# EAGLE board RSeries VCSensor v1.1 (EAGLE 6.4)
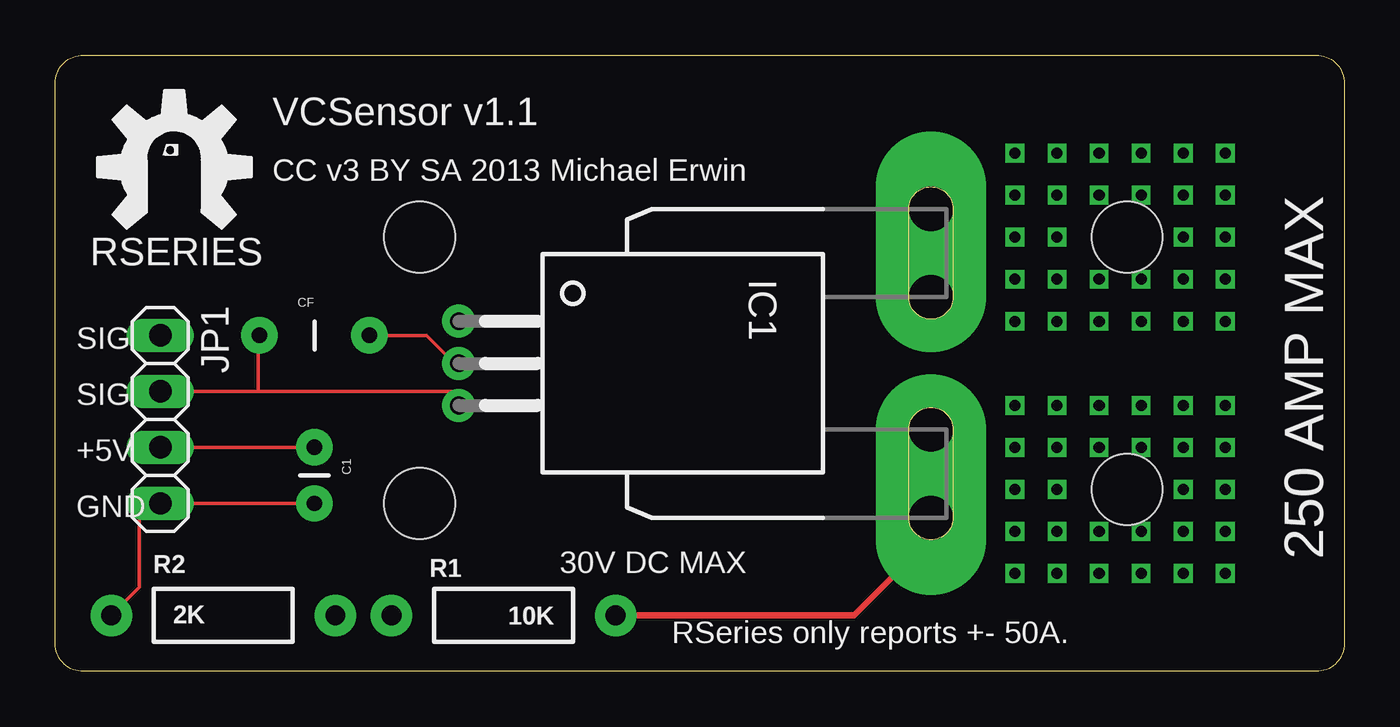
[diagram p0: board, top side]
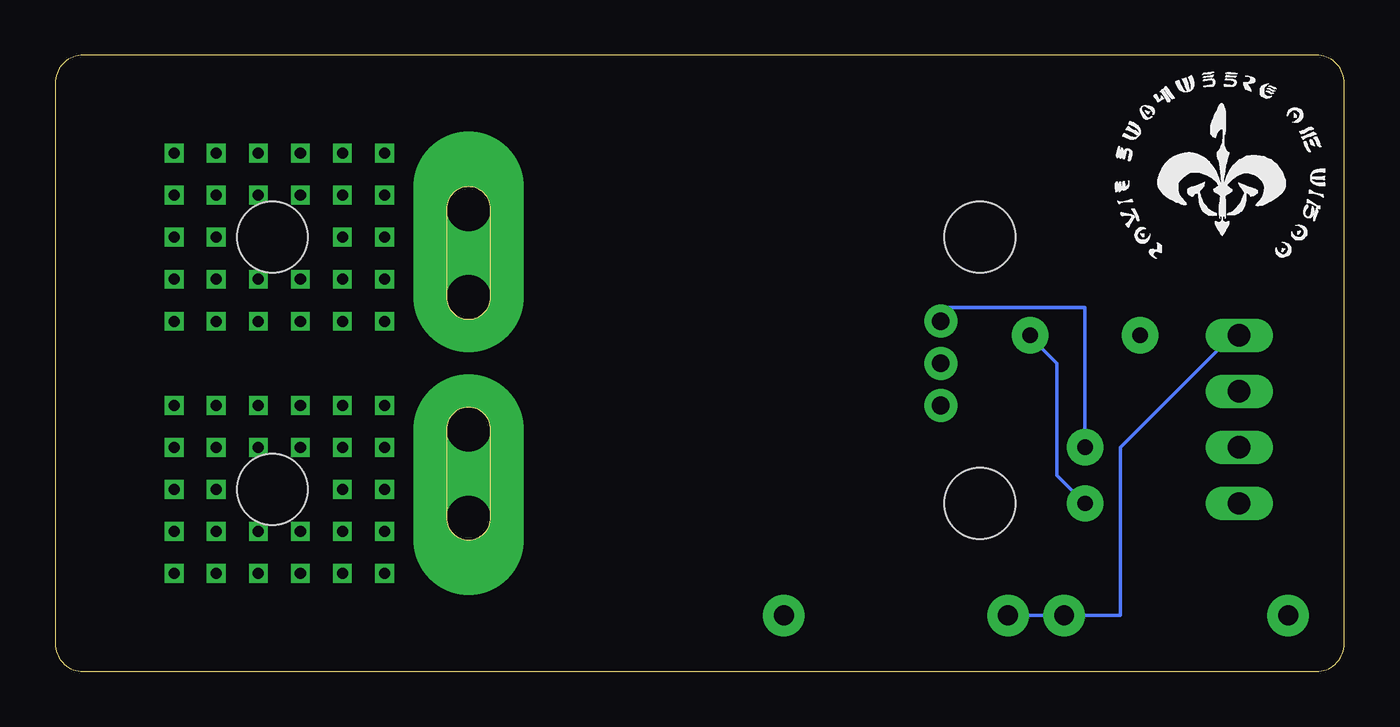
[diagram p1: board, bottom side, seen from below]

Size 58.42 x 27.94 mm. Coordinates in mm from the lower left corner, seen from the top.
Outline: 0,1.91 0,26.67 arc-90 1.27,27.94 57.15,27.94 arc-90 58.42,26.67 58.42,1.91 58.42,1.27 arc-90 57.15,0 2.54,0 1.91,0 1.27,0 arc-90 0,1.27 0,1.91
Copper layers (1*16): Top 0.0356mm / dielectric 1.5011mm / Bottom 0.0356mm
Design rules "LaenPCBOrder": minimum track width 6mil, minimum drill 13mil, track to track 6mil, track to pad 6mil, pad to pad 6mil, via to via 6mil, smd to smd 6mil, copper to edge 15mil, drill to drill 6mil, minimum pad ring 7mil, minimum via ring 7mil, stop-mask expansion 4mil, vias tented up to drill 0mil, thermal gap 10mil
Holes 3.2 mm at 48.58,19.68 48.58,8.26 16.51,7.62 16.51,19.68

## Footprints (pad centres in the part's own frame; a part is rotated, then mirrored left to right if it is on the bottom)
CAP-PTH-SMALL = drill 0.7 pad 1.651: 1 0,0; 2 2.54,0
CAP-PTH-5MM = drill 0.7 pad 1.651: 1 -2.5,0; 2 2.5,0
CB-PFF = drill 0.8 pad 1.5: 1 -1.91,-21.4; 2 0,-21.4; 3 1.91,-21.4 | drill 2 pad 5 offset: 4 3,0; 5 -3,0 | drill 2 pad 4 offset: IP+1 7,0; IP-1 -7,0
1X04 = drill 1.016 long: 1 -3.81,0; 2 -1.27,0; 3 1.27,0; 4 3.81,0
AXIAL-0.4 = drill 0.9 pad 1.88: P$1 -5.08,0; P$2 5.08,0

## Placement (x,y rotation side)
C1  .1 uf  [CAP-PTH-SMALL]  11.75,10.16 270 top
CF  [CAP-PTH-5MM]  11.75,15.24 0 top
IC1  ACS758  [CB-PFF]  39.69,13.97 270 top
JP1  [1X04]  4.76,11.43 270 top
R1  10K  [AXIAL-0.4]  20.32,2.54 180 top
R2  2K  [AXIAL-0.4]  7.62,2.54 0 top
U$1  RSERIES-OSHW-LOGO  [RSERIES-OSHW-LOGO-LARGE]  5.4,22.86 0 top
U$3  [ROYAL-ENGINEERS-OF-NABOO-SMALL]  10.48,18.41 0 bottom

## Library data of the parts
C1 CF R1 R2 = SparkFun-Passives
IC1 = allegro; MPN: ACS758LCB-050B-PFF-T; OC_FARNELL: 1718997; OC_NEWARK: 04R7131
JP1 = pinhead
U$1 U$3 = rseries

## Nets
GND: C1.2 CF.2 IC1.2 JP1.4 R2.P$1
N$1: R1.P$1
N$2: CF.1 IC1.3 JP1.2
N$3: JP1.1 R1.P$2 R2.P$2
VCC: C1.1 IC1.1 JP1.3

## Tracks (layer width: path | path; a pad name or v marks a point on that pad's centre or on a via)
GND
  Top 0.152: IC1.2 18.1,13.97 16.83,15.24 14.29,15.24 CF.2 | C1.2 5.4,7.62 JP1.4 3.81,7.62 3.81,3.81 R2.P$1
  Bottom 0.152: C1.2 13.02,8.89 13.02,13.97 14.29,15.24 CF.2
N$1
  Top 0.305: R1.P$1 36.2,2.54 38.1,4.45
N$2
  Top 0.152: 9.21,12.7 5.4,12.7 JP1.2 | 9.21,12.7 18.1,12.7 IC1.3 | 9.21,12.7 9.21,15.24 CF.1
N$3
  Bottom 0.152: JP1.1 5.08,15.24 10.16,10.16 10.16,2.54 R2.P$2 R1.P$2
N$4  (via drill 0.5 pad 0.25)
  other vias: 53.02,23.5
N$5  (via drill 0.5 pad 0.25)
  other vias: 51.12,23.5
N$6  (via drill 0.5 pad 0.25)
  other vias: 49.21,23.5
N$7  (via drill 0.5 pad 0.25)
  other vias: 47.31,23.5
N$8  (via drill 0.5 pad 0.25)
  other vias: 45.4,23.5
N$9  (via drill 0.5 pad 0.25)
  other vias: 43.5,23.5
N$10  (via drill 0.5 pad 0.25)
  other vias: 53.02,21.59
N$11  (via drill 0.5 pad 0.25)
  other vias: 53.02,19.68
N$12  (via drill 0.5 pad 0.25)
  other vias: 53.02,17.78
N$13  (via drill 0.5 pad 0.25)
  other vias: 53.02,15.88
N$14  (via drill 0.5 pad 0.25)
  other vias: 51.12,15.88
N$15  (via drill 0.5 pad 0.25)
  other vias: 49.21,15.88
N$16  (via drill 0.5 pad 0.25)
  other vias: 47.31,15.88
N$17  (via drill 0.5 pad 0.25)
  other vias: 45.4,15.88
N$18  (via drill 0.5 pad 0.25)
  other vias: 43.5,15.88
N$19  (via drill 0.5 pad 0.25)
  other vias: 43.5,17.78
N$20  (via drill 0.5 pad 0.25)
  other vias: 43.5,19.68
N$21  (via drill 0.5 pad 0.25)
  other vias: 43.5,21.59
N$22  (via drill 0.5 pad 0.25)
  other vias: 45.4,21.59
N$23  (via drill 0.5 pad 0.25)
  other vias: 45.4,19.68
N$24  (via drill 0.5 pad 0.25)
  other vias: 45.4,17.78
N$25  (via drill 0.5 pad 0.25)
  other vias: 47.31,17.78
N$26  (via drill 0.5 pad 0.25)
  other vias: 47.31,21.59
N$27  (via drill 0.5 pad 0.25)
  other vias: 51.12,21.59
N$28  (via drill 0.5 pad 0.25)
  other vias: 51.12,19.68
N$29  (via drill 0.5 pad 0.25)
  other vias: 51.12,17.78
N$30  (via drill 0.5 pad 0.25)
  other vias: 49.21,17.78
N$31  (via drill 0.5 pad 0.25)
  other vias: 49.21,21.59
N$32  (via drill 0.5 pad 0.25)
  other vias: 43.5,12.06
N$33  (via drill 0.5 pad 0.25)
  other vias: 43.5,10.16
N$34  (via drill 0.5 pad 0.25)
  other vias: 43.5,8.26
N$35  (via drill 0.5 pad 0.25)
  other vias: 45.4,12.06
N$36  (via drill 0.5 pad 0.25)
  other vias: 47.31,12.06
N$37  (via drill 0.5 pad 0.25)
  other vias: 49.21,12.06
N$38  (via drill 0.5 pad 0.25)
  other vias: 51.12,12.06
N$39  (via drill 0.5 pad 0.25)
  other vias: 53.02,12.06
N$40  (via drill 0.5 pad 0.25)
  other vias: 53.02,10.16
N$41  (via drill 0.5 pad 0.25)
  other vias: 53.02,8.26
N$42  (via drill 0.5 pad 0.25)
  other vias: 53.02,6.35
N$43  (via drill 0.5 pad 0.25)
  other vias: 53.02,4.45
N$44  (via drill 0.5 pad 0.25)
  other vias: 51.12,4.45
N$45  (via drill 0.5 pad 0.25)
  other vias: 49.21,4.45
N$46  (via drill 0.5 pad 0.25)
  other vias: 47.31,4.45
N$47  (via drill 0.5 pad 0.25)
  other vias: 45.4,4.45
N$48  (via drill 0.5 pad 0.25)
  other vias: 43.5,4.45
N$49  (via drill 0.5 pad 0.25)
  other vias: 43.5,6.35
N$51  (via drill 0.5 pad 0.25)
  other vias: 45.4,10.16
N$52  (via drill 0.5 pad 0.25)
  other vias: 45.4,8.26
N$53  (via drill 0.5 pad 0.25)
  other vias: 45.4,6.35
N$54  (via drill 0.5 pad 0.25)
  other vias: 47.31,6.35
N$55  (via drill 0.5 pad 0.25)
  other vias: 47.31,10.16
N$56  (via drill 0.5 pad 0.25)
  other vias: 49.21,10.16
N$57  (via drill 0.5 pad 0.25)
  other vias: 49.21,6.35
N$58  (via drill 0.5 pad 0.25)
  other vias: 51.12,6.35
N$59  (via drill 0.5 pad 0.25)
  other vias: 51.12,8.26
N$60  (via drill 0.5 pad 0.25)
  other vias: 51.12,10.16
VCC
  Top 0.152: C1.1 5.4,10.16 JP1.3
  Bottom 0.152: C1.1 11.75,16.51 18.1,16.51 IC1.1

## Text on the board
_tsilk: VCSensor v1.1 | CC v3 BY SA 2013 Michael Erwin | RSERIES | SIG | SIG | +5V | GND | 250 AMP MAX | 30V DC MAX | RSeries only reports +- 50A.